# EAGLE board AguaInfo_v1.0 (EAGLE 8.4.2)
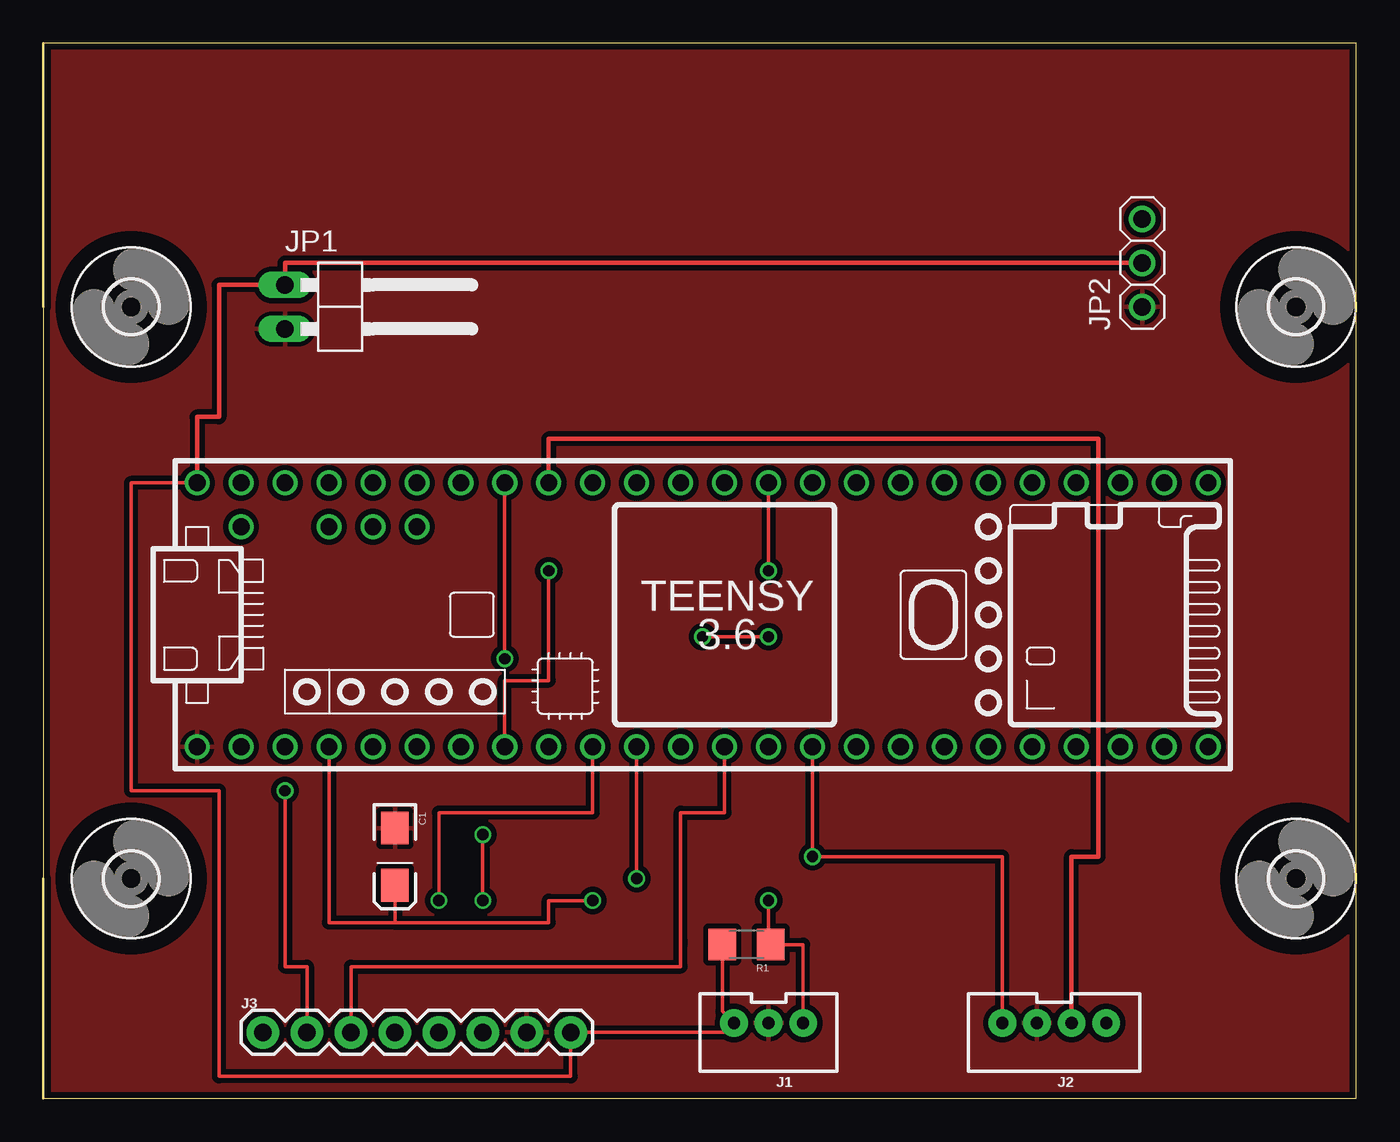
[diagram p0: board, top side]
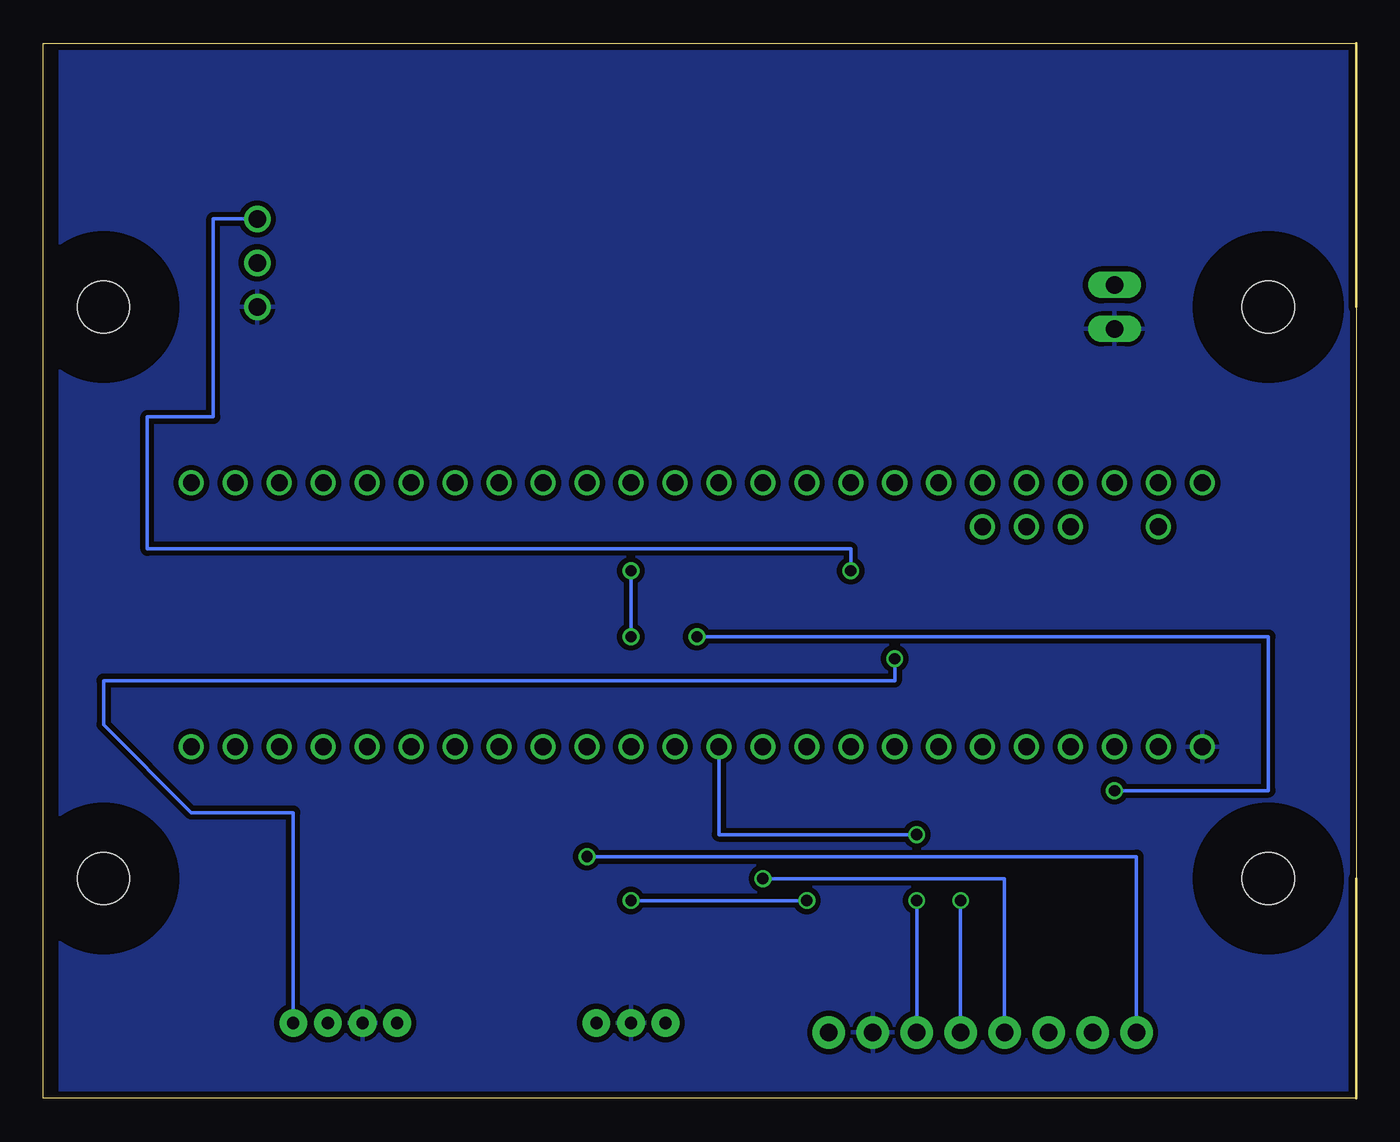
[diagram p1: board, bottom side, seen from below]

Size 75.87 x 60.95 mm. Coordinates in mm from the lower left corner, seen from the top.
Outline: 0,0 75.87,0 75.87,60.95 0,60.95 0,0
Copper layers (1*16): Top 0.035559375mm / dielectric 1.6mm / Bottom 0.035559375mm
Design rules "oshpark-2layer *": minimum track width 10mil, minimum drill 25mil, track to track 10mil, track to pad 10mil, pad to pad 10mil, via to via 10mil, smd to smd 10mil, copper to edge 15mil, drill to drill 10mil, minimum pad ring 5mil, minimum via ring 5mil, stop-mask expansion 2.5mil, vias tented up to drill 0mil, thermal gap 10mil

## Footprints (pad centres in the part's own frame; a part is rotated, then mirrored left to right if it is on the bottom)
EIA3216-KIT = smd 1.9 x 1.6: A 1.65,0; C -1.65,0
3,0 = hole 3: 0,0
JST-3-PTH-VERT = drill 0.7 pad 1.6: 1 -2,-0.55; 2 0,-0.55; 3 2,-0.55
JST-4-PTH-VERT = drill 0.7 pad 1.6: 1 -3,-0.55; 2 -1,-0.55; 3 1,-0.55; 4 3,-0.55
1X08 = drill 1.016 pad 1.88: 1 0,0; 2 2.54,0; 3 5.08,0; 4 7.62,0; 5 10.16,0; 6 12.7,0; 7 15.24,0; 8 17.78,0
1X02/90 = drill 1.016 long: 1 -1.27,-3.81; 2 1.27,-3.81
1X03 = drill 1.016: 1 -2.54,0; 2 0,0; 3 2.54,0
1206 = smd 1.6 x 1.8: 1 -1.4,0; 2 1.4,0
TEENSY_3.5/3.6_BASIC = drill 0.965: 0/RX -25.4,-7.62; 1/TX -22.86,-7.62; 2 -20.32,-7.62; 3/CANTX -17.78,-7.62; 3V3 7.62,-7.62; 3V3_LO -22.86,7.62; 4/CANRX -15.24,-7.62; 5 -12.7,-7.62; 6 -10.16,-7.62; 7 -7.62,-7.62; 8 -5.08,-7.62; 9/CS -2.54,-7.62; 10/CS 0,-7.62; 11/MOSI 2.54,-7.62; 12/MISO 5.08,-7.62; 13/SCK 5.08,7.62; 14/A0 2.54,7.62; 15/A1 0,7.62; 16/A2 -2.54,7.62; 17/A3 -5.08,7.62; 18/A4/SDA -7.62,7.62; 19/A5/SCL -10.16,7.62; 20/A6 -12.7,7.62; 21/A7 -15.24,7.62; 21/DAC0 12.7,7.62; 22/A8 -17.78,7.62; 23/A9 -20.32,7.62; 24 10.16,-7.62; 25 12.7,-7.62; 26 15.24,-7.62; 27 17.78,-7.62; 28 20.32,-7.62; 29 22.86,-7.62; 30 25.4,-7.62; 31/A12 27.94,-7.62; 32/A13 30.48,-7.62; 33/A14 30.48,7.62; 34/A15 27.94,7.62; 35/A16 25.4,7.62; 36/A17 22.86,7.62; 37/A18 20.32,7.62; 38/A19 17.78,7.62; 39/A20 15.24,7.62; A10 -17.78,5.08; A11 -15.24,5.08; A22/DAC1 10.16,7.62; AGND -25.4,7.62; AREF -20.32,5.08; GND -27.94,-7.62; GND2 7.62,7.62; VIN -27.94,7.62; VUSB -25.4,5.08

## Placement (x,y rotation side)
C1  0.1uF  [EIA3216-KIT]  20.32,13.97 270 top
H1  MOUNT-HOLE3.0  [3,0]  72.39,12.7 0 top
H2  MOUNT-HOLE3.0  [3,0]  72.39,45.72 0 top
H3  MOUNT-HOLE3.0  [3,0]  5.08,45.72 0 top
H4  MOUNT-HOLE3.0  [3,0]  5.08,12.7 0 top
J1  WFS  [JST-3-PTH-VERT]  41.91,3.81 180 top
J2  TOF  [JST-4-PTH-VERT]  58.42,3.81 180 top
J3  2.8TFT  [1X08]  12.7,3.81 0 top
JP1  5Vin  [1X02/90]  17.78,45.72 270 top
JP2  5v Relay  [1X03]  63.5,48.26 90 top
R1  10K  [1206]  40.64,8.89 180 top
U$1  TEENSY_3.5/3.6_BASIC  [TEENSY_3.5/3.6_BASIC]  36.83,27.94 0 top

## Library data of the parts
C1 = SparkFun-Passives
H1-H4 = holes
J1 = SparkFun-Connectors; PROD_ID: CONN-13230
J2 = SparkFun-Connectors; PROD_ID: CONN-13251
J3 = SparkFun-Connectors; PROD_ID: CONN-08438
JP1 = pinhead
JP2 = adafruit
R1 = SparkFun-Resistors
U$1 = Teensy356

## Nets
3V3: J2.4 J3.1 U$1.3V3
5V: J1.3 J3.8 JP1.1 JP2.2 R1.2 U$1.VIN
A0: J3.4 U$1.9/CS
CS: J3.6 U$1.10/CS
D6: JP2.3 U$1.6
GND: C1.C J1.2 J2.3 J3.7 JP1.2 JP2.1 U$1.GND
INT2: C1.A J1.1 R1.1 U$1.2
MOSI: J3.3 U$1.11/MOSI
RESET: J3.5 U$1.8
SCK: J3.2 U$1.13/SCK
SCL: J2.1 U$1.19/A5/SCL
SDA: J2.2 U$1.18/A4/SDA

## Tracks (layer width: path | path; a pad name or v marks a point on that pad's centre or on a via)
3V3  (via drill 0.65)
  Top 0.203: J2.4 55.42,13.97 v44.45,13.97 U$1.3V3
  Bottom 0.203: v44.45,13.97 12.7,13.97 J3.1
5V
  Top 0.203: U$1.VIN 5.08,35.56 5.08,17.78 10.16,17.78 10.16,1.27 30.48,1.27 J3.8 39.36,3.81 J1.3 39.24,5.03 R1.2
  Top 0.254: JP2.2 13.97,48.26 JP1.1 10.16,46.99 10.16,39.37 8.89,39.37 U$1.VIN
A0  (via drill 0.65)
  Top 0.203: v34.29,12.7 U$1.9/CS
  Bottom 0.203: J3.4 20.32,12.7 v34.29,12.7
CS  (via drill 0.65)
  Top 0.203: v25.4,15.24 v25.4,11.43
  Bottom 0.203: U$1.10/CS 36.83,15.24 v25.4,15.24 | v25.4,11.43 J3.6
D6  (via drill 0.65)
  Top 0.203: U$1.6 26.67,24.13 29.21,24.13 v29.21,30.48
  Bottom 0.203: v29.21,30.48 29.21,31.75 69.85,31.75 69.85,39.37 66.04,39.37 66.04,50.8 JP2.3
GND
  pour Bottom (isolate 0.305): 0,0 0,60.96 74.93,60.96 74.93,0
  pour Top (isolate 0.305): 0,0 0,60.96 76.2,60.96 76.2,0
INT2  (via drill 0.65)
  Top 0.203: J1.1 43.91,8.89 R1.1 41.91,8.89 v41.91,11.43 | U$1.2 16.51,10.16 20.26,10.16 | 20.26,10.16 29.21,10.16 29.21,11.43 v31.75,11.43 | C1.A 20.32,10.16 20.26,10.16
  Bottom 0.203: v31.75,11.43 v41.91,11.43
MOSI
  Top 0.203: 36.83,9.09 36.83,8.89 | 36.83,9.09 36.83,16.51 39.37,16.51 U$1.11/MOSI | J3.3 17.78,7.62 36.83,7.62 36.83,9.09
RESET  (via drill 0.65)
  Top 0.203: U$1.8 31.75,16.51 22.86,16.51 v22.86,11.43
  Bottom 0.203: v22.86,11.43 J3.5
SCK  (via drill 0.65)
  Top 0.203: U$1.13/SCK v41.91,30.48 | v38.1,26.67 v41.91,26.67 | J3.2 15.24,7.62 13.97,7.62 v13.97,17.78
  Bottom 0.203: v41.91,26.67 v41.91,30.48 | v13.97,17.78 5.08,17.78 5.08,26.67 v38.1,26.67
SCL  (via drill 0.65)
  Top 0.203: v26.67,25.4 U$1.19/A5/SCL
  Bottom 0.203: J2.1 61.42,16.51 67.31,16.51 72.39,21.59 72.39,24.13 26.67,24.13 v26.67,25.4
SDA
  Top 0.254: J2.2 59.42,13.97 60.96,13.97 60.96,38.1 29.21,38.1 U$1.18/A4/SDA

## Text on the board
_bsilk: Aguaingo by Flatbox | v1.0